# Altium PCB MJVESC_MINI_CIR_VER03.PcbDoc (part 2 of 2)
Units mm, origin at the board's own origin, x right, y up, seen from the top; angles counter-clockwise.
Board outline 57.82 x 58.2 mm, 2 copper layers (Component Side, Bottom Layer), stack 0.325 mm thick; 121 components, 105 nets, 463 pads, 467 vias.
Unrouted connection lines stored in the file: 33.
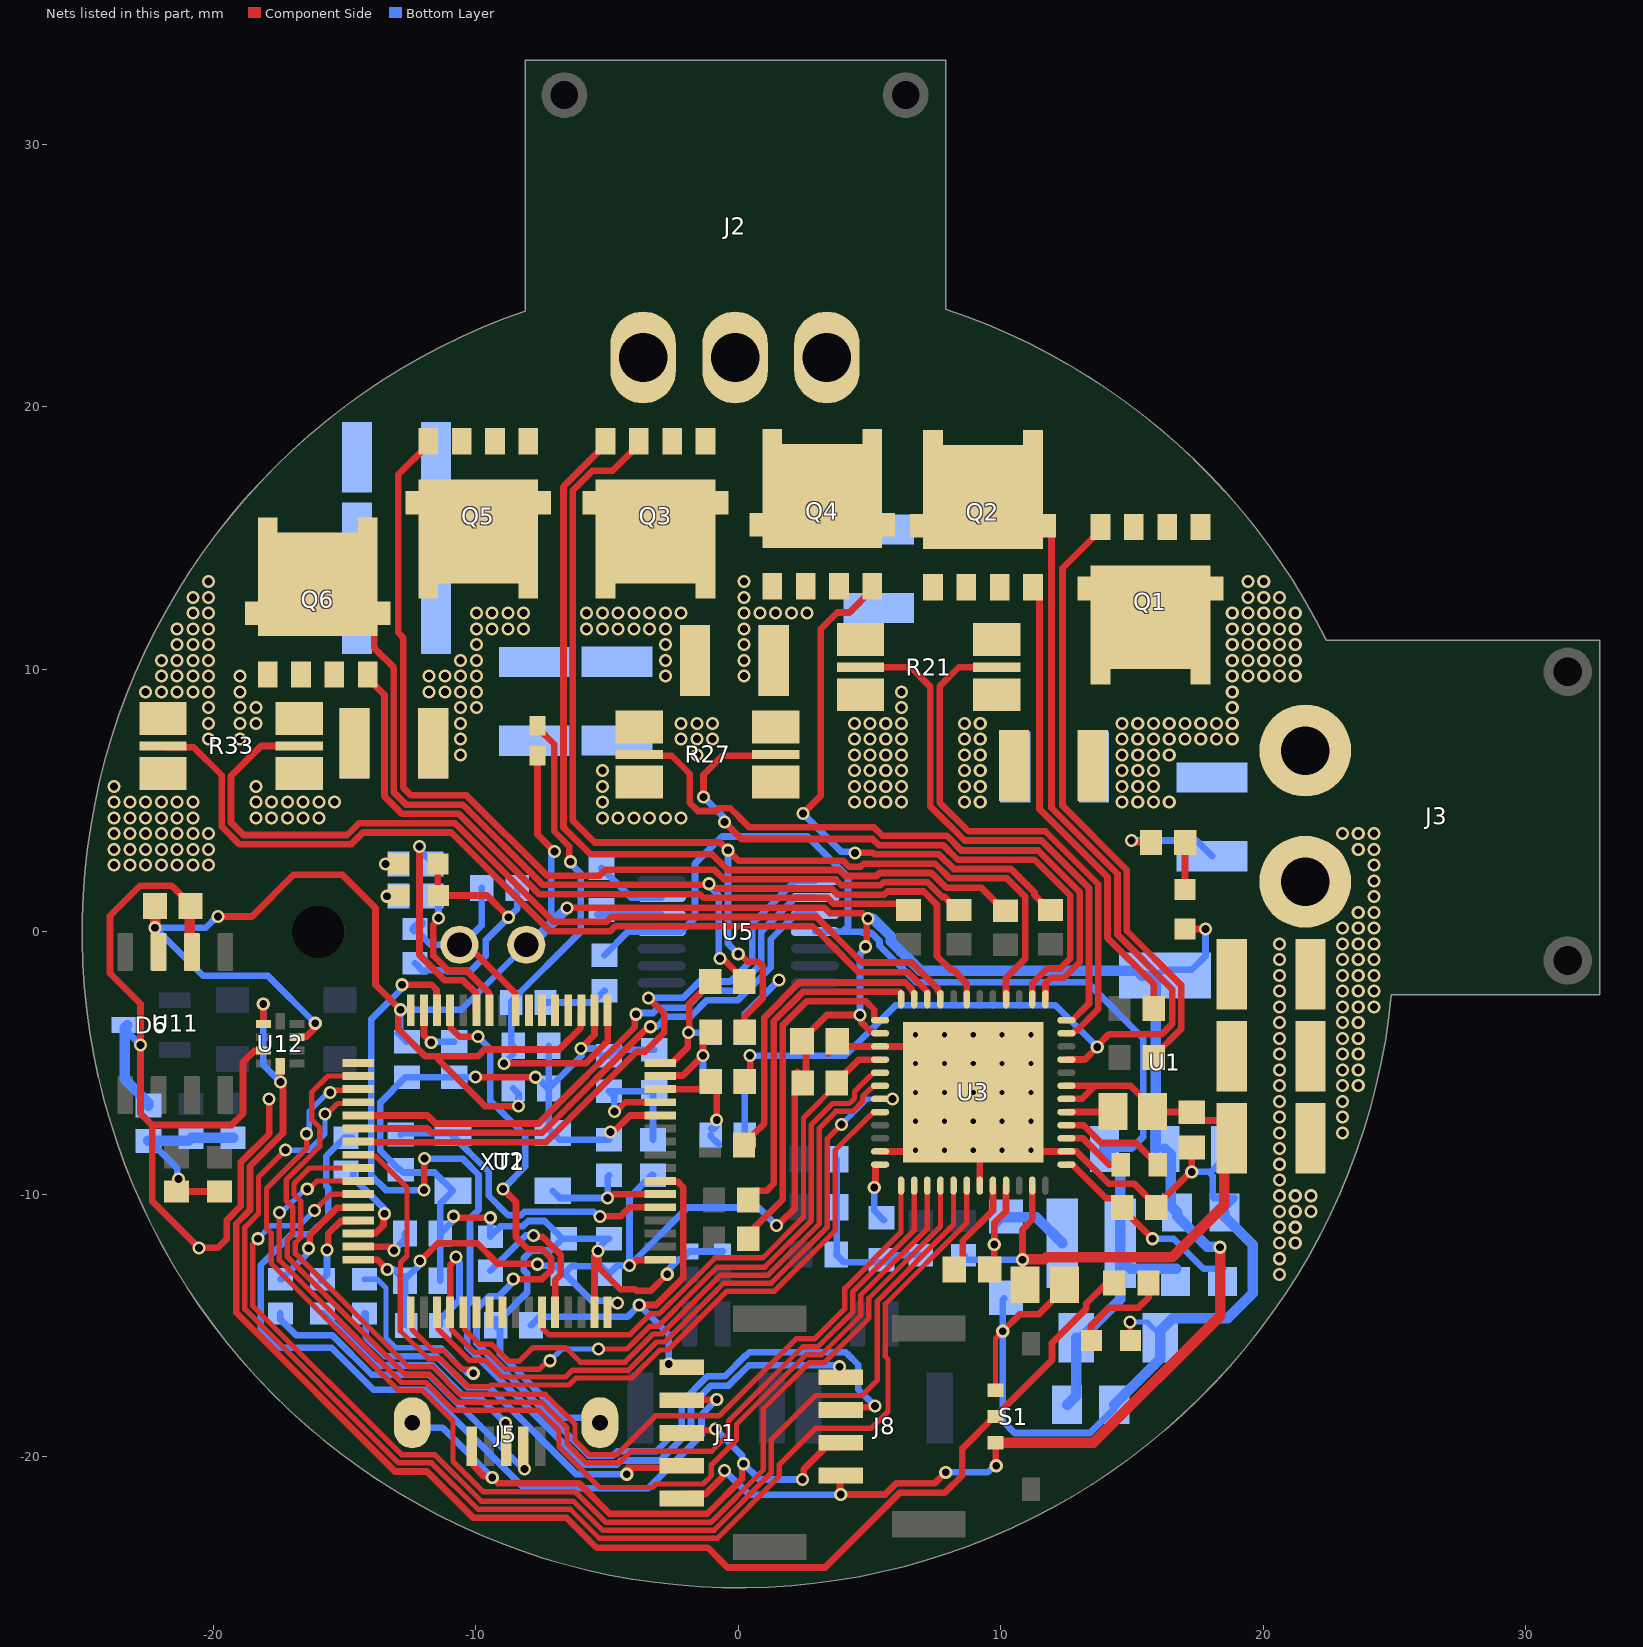
[diagram p2: the nets of this part, all layers, seen from the top]

## Via types
v1: diameter 0.5, hole 0.3, Component Side to Bottom Layer, tented both sides, 442 vias
v2: diameter 0.5, hole 0.2, Component Side to Bottom Layer, 25 vias

## Nets (pads, with @x,y where several pads share a name; then routed paths per layer and width w, separated by ;. In a path a pad name is that pad's centre, name@x,y a point inside that pad or via, vN(x,y) a via of type N, cw(c..) or ccw(c..) an arc to the next point about the centre after c; other vN are vias at no path point) (continued)
GND: C1.1 C2.2 C3.1 C4.1 C5.2 C6.2 C7.2 C8.1 C9.1 C10.1 C11.1 C12.2 C13.1 C14.2 C15.2 C16.2 C17.1 C19.2 C22.1 C23.1 C24.2 C25.2 C26.2 C32.1 C33.2 C34.2 C35.2 C37.1 C40.2 C41.2 C42.2 C43.2 C44.2 C46.2 C47.1 C48.1 C49.2 C50.2 C59.1 C65.1 D1.2 D3.2 D4.2 D5.2 D6.3 J1.3 J3.2 J5.5 J5.6 J5.7 J8.2 R3.2 R6.1 R7.2 R15.1 R21.2 R24.1 R27.2 R29.1 R33.2 R35.2 R37.2 R44.2 S1.2 U1.1 U2.12 U2.18 U2.63 U3.2 U3.27 U3.35 U3.43 U3.49 U5.13 U11.2 U12.3 XT1.G | length 212.5
  Component Side w0.203: 3.425,-4.675 3.675,-4.425 C26.2@3.675,-4.175 ; S1.2@9.795,-17.475 9.795,-15.505 v1(10.075,-15.225) ; v1(14.925,-14.875) 14.925,-15.6 D5.2@14.95,-15.575
  Component Side w0.254: C47.1@-20.875,0.975 -20.875,1.025 -21.602,1.752 -22.79,1.752 -23.937,0.605 -23.937,-1.585 -22.775,-2.747 v1(-22.775,-4.325) -22.775,-6.927 -22.335,-7.367 ; U12.3@-18.09,-4.525 -18.113,-4.548 -18.445,-4.548 -18.875,-4.978 -18.875,-6.937 -19.305,-7.367 -22.335,-7.367 ; v1(-17.875,-6.378) -17.875,-7.704 -18.963,-8.791 -18.963,-10.463 -19.485,-10.985 -19.485,-11.699 -19.837,-12.05 v1(-20.55,-12.05) -22.335,-10.265 -22.335,-7.367 ; D1.2@-11.45,2.575 -11.45,1.4 D3.2@-11.425,1.375 -9.575,1.375 v1(-8.75,0.55) ; v1(-10.85,-10.844) -10.85,-10.9 v1(-9.45,-10.9) ; J5.5@-10.15,-19.6 -10.077,-19.673 -10.077,-20.365 -9.689,-20.753 -9.422,-20.753 v1(-9.375,-20.8) -9.161,-21.014 -6.075,-21.014 -4.912,-22.177 -1.185,-22.177 0.153,-20.839 0.153,-20.32 v1(0.2,-20.273) ; v1(-10.013,-5.544) -10.01,-5.548 v1(-7.725,-5.548) ; v1(-6,-4.45) -5.479,-3.929 U2.18@-5.479,-3.003 ; U2.63@-5.479,-14.503 -5.479,-12.371 -5.35,-12.242 v1(-5.35,-12.175) -5.315,-12.21 -5.315,-12.806 -4.497,-13.624 -3.942,-13.624 -3.888,-13.678 -3.332,-13.678 -2.711,-13.056 v1(-2.711,-13.053) ; v1(-4.875,-7.637) -4.767,-7.637 -4.132,-7.003 U2.12@-2.979,-7.003 ; J1.3@-2.15,-19.1 -2.047,-18.997 -0.922,-18.997 v1(-0.875,-18.95) ; v1(2.45,-20.875) 2.497,-20.828 2.497,-20.478 3.325,-19.65 J8.2@3.875,-19.65 ; C26.2@3.675,-4.175 3.875,-4.375 U3.27@5.4,-4.375 6.3,-4.375 v2(6.75,-3.925) v2(7.85,-5.025) v2(8.95,-6.125) ; U3.35@5.4,-8.375 6.35,-8.375 6.4,-8.325 v2(6.75,-8.325) v2(7.85,-7.225) v2(8.95,-6.125) ; U3.43@9.2,-9.675 9.2,-8.575 v2(8.95,-8.325) v2(8.95,-7.225) v2(8.95,-6.125) ; v1(10.075,-15.225) 10.727,-14.573 11.452,-14.573 12.425,-13.6 C22.1@12.425,-13.45 ; v1(14.975,3.475) 15.05,3.4 R3.2@15.725,3.4 ; R37.2@15.925,-10.503 R37.2@15.925,-10.453 ; C9.1@17.275,-8.225 v1(17.275,-9.153) 17.225,-9.153 R37.2@15.925,-10.453 ; v2(8.95,-6.125) v2(10.05,-7.225) v2(11.15,-8.325) 11.2,-8.375 U3.2@12.5,-8.375 12.502,-8.377 12.885,-8.377 14.11,-9.602 15.074,-9.602 R37.2@15.925,-10.453
  Component Side w0.4: U11.2@-20.9,-0.8 -20.9,0.95 C47.1@-20.875,0.975
  Bottom Layer w0.203: v1(14.925,-14.875) 15.575,-14.875 16.075,-15.375 16.125,-15.425 C59.1@16.075,-15.475
  Bottom Layer w0.254: D6.3@-23.275,-3.56 -23.275,-3.825 v1(-22.775,-4.325) ; J5.7@-12.425,-18.71 -12.237,-18.898 -11.277,-18.898 v1(-9.375,-20.8) ; R7.2@-12.325,-1.2 -12.027,-1.498 -11.894,-1.498 -11.869,-1.473 -11.118,-1.473 -11.089,-1.502 -10.205,-1.502 -9.618,-0.915 -9.618,-0.316 -8.421,0.881 C17.1@-8.421,1.664 ; C1.1@-11.352,-13.303 C10.1@-11.352,-11.498 ; v1(-10.85,-10.844) -10.85,-10.997 C10.1@-11.352,-11.498 ; v1(-10.013,-5.544) C11.1@-10.822,-5.544 C4.1@-12.627,-5.544 -12.677,-5.544 -13.637,-6.505 -13.637,-8.351 -12.91,-9.078 C16.2@-12.86,-9.078 -12.76,-9.177 -11.573,-9.177 XT1.G@-10.875,-9.875 -11.352,-10.352 C10.1@-11.352,-11.498 ; v1(-9.45,-10.9) R6.1@-9.45,-11.625 -9.047,-11.222 -8.201,-11.222 -8.004,-11.025 -7.375,-11.025 C5.2@-6.7,-11.7 ; v1(-7.725,-5.548) -7.7,-5.523 -7.248,-5.975 C2.2@-7.225,-5.975 ; R35.2@-7.35,-2.7 -5.55,-2.7 C23.1@-5.1,-2.25 ; C37.1@-7.225,-4.35 C2.2@-7.225,-5.975 ; v1(-6,-4.45) -5.478,-4.45 -5.2,-4.728 C7.2@-4.927,-4.728 -4.699,-4.5 C6.2@-3.2,-4.5 ; -5.978,-4.728 C2.2@-7.225,-5.975 ; v1(-5.35,-12.175) -5.35,-12.108 -5.298,-12.056 -5.298,-12.023 C65.1@-4.975,-11.7 ; J5.6@-5.275,-18.71 -5.461,-18.524 -6.637,-18.524 -9.079,-16.082 -9.079,-15.171 C13.1@-9.25,-15 -9.25,-14.773 -9.073,-14.773 -8.048,-13.748 -8.048,-13.022 -8.179,-12.891 -8.179,-12.455 -7.87,-12.146 -7.146,-12.146 C5.2@-6.7,-11.7 ; C24.2@-5.213,2.425 -4.088,1.3 U5.13@-2.925,1.3 ; C14.2@-4.927,-7.932 -6.818,-7.932 XT1.G@-7.075,-7.675 -7.225,-7.525 C2.2@-7.225,-5.975 ; C65.1@-4.925,-11.7 C65.1@-4.975,-11.7 ; v1(-2.711,-13.053) -2.664,-13.006 -2.664,-12.876 -2.276,-12.488 -2.164,-12.488 -1.861,-12.185 C48.1@-1.841,-12.185 C49.2@-0.6,-12.185 ; v1(-0.875,-18.95) 0.153,-19.978 0.153,-20.226 v1(0.2,-20.273) 0.802,-20.875 v1(2.45,-20.875) ; R15.1@0.25,-7.75 R24.1@0.25,-5.7 ; R15.1@0.25,-7.725 R15.1@0.25,-7.7 ; R29.1@0.25,-3.85 0.25,-3.141 v1(1.55,-1.841) ; C19.2@3.75,-8.675 C15.2@3.75,-10.5 3.75,-12.275 C12.2@3.725,-12.3 4.025,-12.6 5.6,-12.6 5.875,-12.325 R44.2@6.95,-12.325 ; D4.2@10.125,-13.975 10.075,-14.025 v1(10.075,-15.225) 10.075,-18.65 10.525,-19.1 13.4,-19.1 14.325,-18.175 C3.1@14.325,-18.025 ; v1(14.975,3.475) 17.45,3.475 C42.2@18.05,2.875 ; v1(17.275,-9.153) 17.921,-9.153 ; C8.1@18.519,-10.7 18.519,-10.55 18.919,-10.15 18.119,-10.15 18.071,-10.102 18.071,-9.302 17.921,-9.153 ; U1.1@18.55,-8.275 18.55,-8.6 17.997,-9.153 17.921,-9.153 ; C5.2@-6.7,-11.7 C5.2@-6.65,-11.7 C65.1@-4.975,-11.7
  Bottom Layer w0.4: D6.3@-23.275,-3.56 -23.375,-3.66 -23.375,-5.625 -22.475,-6.525 C50.2@-22.475,-6.625 ; C3.1@14.325,-18.025 16.075,-16.275 C59.1@16.075,-15.475 16.075,-15.375 16.075,-15.2 16.55,-14.725 18.645,-14.725 19.6,-13.77 19.6,-11.931 18.519,-10.85 C8.1@18.519,-10.7
  other v1: 20.619,-13.065 20.619,-12.465 20.619,-11.865 21.219,-11.865 20.619,-11.265 21.219,-11.265 20.619,-10.665 21.219,-10.665 21.819,-10.665 20.619,-10.065 21.219,-10.065 21.819,-10.065 20.619,-9.465 20.619,-8.865 20.619,-8.265 20.619,-7.665 23.019,-7.665 20.619,-7.065 23.019,-7.065 20.619,-6.465 23.019,-6.465 20.619,-5.865 23.019,-5.865 23.619,-5.865 20.619,-5.265 23.019,-5.265 23.619,-5.265 20.619,-4.665 23.019,-4.665 23.619,-4.665 20.619,-4.065 23.019,-4.065 23.619,-4.065 20.619,-3.465 23.019,-3.465 23.619,-3.465 20.619,-2.865 23.019,-2.865 23.619,-2.865 24.219,-2.865 20.619,-2.265 23.019,-2.265 23.619,-2.265 24.219,-2.265 20.619,-1.665 23.019,-1.665 23.619,-1.665 24.219,-1.665 20.619,-1.065 23.019,-1.065 23.619,-1.065 24.219,-1.065 20.619,-0.465 23.019,-0.465 23.619,-0.465 24.219,-0.465 23.019,0.135 23.619,0.135 24.219,0.135 23.619,0.735 24.219,0.735 24.219,1.335 24.219,1.935 -23.781,2.535 -23.181,2.535 -22.581,2.535 -21.981,2.535 -21.381,2.535 -20.781,2.535 -20.181,2.535 24.219,2.535 -23.781,3.135 -23.181,3.135 -22.581,3.135 -21.981,3.135 -21.381,3.135 -20.781,3.135 -20.181,3.135 23.619,3.135 24.219,3.135 -23.781,3.735 -23.181,3.735 -22.581,3.735 -21.981,3.735 -21.381,3.735 -20.781,3.735 -20.181,3.735 23.019,3.735 23.619,3.735 24.219,3.735 -23.781,4.335 -23.181,4.335 -22.581,4.335 -21.981,4.335 -21.381,4.335 -20.781,4.335 -5.181,4.335 -4.581,4.335 -3.981,4.335 -3.381,4.335 -2.781,4.335 -2.181,4.335 -23.781,4.935 -23.181,4.935 -22.581,4.935 -21.981,4.935 -21.381,4.935 -20.781,4.935 -5.181,4.935 4.419,4.935 5.019,4.935 5.619,4.935 6.219,4.935 -23.781,5.535 -5.181,5.535 4.419,5.535 5.019,5.535 5.619,5.535 6.219,5.535 -5.181,6.135 4.419,6.135 5.019,6.135 5.619,6.135 6.219,6.135 -1.581,6.735 4.419,6.735 5.019,6.735 5.619,6.735 6.219,6.735 -20.181,7.335 -2.181,7.335 -1.581,7.335 -0.981,7.335 4.419,7.335 5.019,7.335 5.619,7.335 6.219,7.335 -20.181,7.935 -2.181,7.935 -1.581,7.935 -0.981,7.935 4.419,7.935 5.019,7.935 5.619,7.935 6.219,7.935 -20.181,8.535 6.219,8.535 -22.581,9.135 -21.981,9.135 -21.381,9.135 -20.781,9.135 -20.181,9.135 6.219,9.135 -21.981,9.735 -21.381,9.735 -20.781,9.735 -20.181,9.735 -21.981,10.335 -21.381,10.335 -20.781,10.335 -20.181,10.335 -21.381,10.935 -20.781,10.935 -20.181,10.935 -21.381,11.535 -20.781,11.535 -20.181,11.535 -20.781,12.135 -20.181,12.135 -20.781,12.735 -20.181,12.735 -20.181,13.335
  other v2: 7.85,-8.325 10.05,-8.325 6.75,-7.225 11.15,-7.225 6.75,-6.125 7.85,-6.125 10.05,-6.125 11.15,-6.125 6.75,-5.025 8.95,-5.025 10.05,-5.025 11.15,-5.025 7.85,-3.925 8.95,-3.925 10.05,-3.925 11.15,-3.925
H1: U2.41 U3.37 | length 37.9
  Component Side w0.203: U2.41@-14.479,-9.003 -16.337,-9.003 -16.927,-9.593 -16.927,-10.008 -16.671,-10.264 -16.671,-11.647 -16.879,-11.855 -16.879,-12.27 -12.575,-16.575 -11.654,-16.575 -10.599,-17.63 -9.347,-17.63 -9.334,-17.618 -8.416,-17.618 -8.403,-17.63 -7.357,-17.63 -6.227,-18.761 -6.227,-19.379 -5.669,-19.937 -4.648,-19.937 -3.16,-18.449 -0.737,-18.449 2.197,-15.515 2.909,-15.515 4.059,-14.365 4.059,-13.593 6.2,-11.452 U3.37@6.2,-9.675
H2: U2.42 U3.39 | length 40.7
  Component Side w0.203: v1(-17.476,-10.701) -17.485,-10.71 -17.485,-12.521 -12.826,-17.181 -11.905,-17.181 -10.85,-18.236 -9.096,-18.236 -9.083,-18.223 -8.667,-18.223 -8.654,-18.236 -7.608,-18.236 -6.832,-19.012 -6.832,-19.63 -5.285,-21.178 -3.272,-21.178 -3.143,-21.048 -1.343,-21.048 -1.027,-20.732 -1.027,-20.317 -0.071,-19.361 -0.071,-18.769 2.578,-16.121 3.16,-16.121 4.665,-14.616 4.665,-13.844 7.2,-11.309 U3.39@7.2,-9.675 ; v1(-16.426,-9.8) -16.345,-9.8 -16.048,-9.503 U2.42@-14.479,-9.503
  Bottom Layer w0.203: v1(-17.476,-10.701) -17.401,-10.701 -16.501,-9.8 v1(-16.426,-9.8)
H3: U2.43 U3.41 | length 46.2
  Component Side w0.203: v1(-18.301,-11.701) -18.5,-11.9 -18.5,-14.256 -12.819,-19.937 -11.56,-19.937 -9.793,-21.704 -6.278,-21.704 -5.173,-22.808 -0.924,-22.808 1.251,-20.633 1.251,-19.368 2.946,-17.674 4.707,-17.674 5.296,-17.085 5.296,-14.07 8.2,-11.166 U3.41@8.2,-9.675 ; v1(-16.151,-10.626) -15.528,-10.003 U2.43@-14.479,-10.003
  Bottom Layer w0.203: v1(-18.301,-11.701) -17.802,-11.202 -16.727,-11.202 v1(-16.151,-10.626)
HALL_1: U2.37 U5.2 | length 22.1
  Component Side w0.254: U2.37@-14.479,-7.003 -11.848,-7.003 -11.54,-7.311 -7.615,-7.311 -3.945,-3.641 -3.945,-3.197 v1(-3.898,-3.15)
  Bottom Layer w0.254: v1(-3.898,-3.15) -3.851,-3.103 -3.573,-3.103 -3.568,-3.098 -3.248,-3.098 -3.044,-2.894 -1.979,-2.894 -1.339,-2.254 -0.155,-2.254 0.879,-1.22 0.879,0.004 2.175,1.3 U5.2@2.925,1.3
HALL_2: U2.38 U5.3 | length 21.5
  Component Side w0.254: U2.38@-14.479,-7.503 -11.849,-7.503 -11.686,-7.665 -7.469,-7.665 -3.476,-3.672 -3.397,-3.672 v1(-3.35,-3.625)
  Bottom Layer w0.254: v1(-3.35,-3.625) -3.11,-3.625 -2.733,-3.248 -1.833,-3.248 -1.193,-2.608 -0.008,-2.608 1.233,-1.367 1.233,-0.292 2.175,0.65 U5.3@2.925,0.65
HALL_3: U2.39 U5.1 | length 24
  Component Side w0.254: U2.39@-14.479,-8.003 -14.462,-8.019 -7.319,-8.019 -3.876,-4.576 -3.555,-4.576 -2.823,-3.843 -2.823,-3.122 v1(-3.42,-2.525)
  Bottom Layer w0.254: v1(-3.42,-2.525) -2.111,-2.525 -1.486,-1.9 -0.302,-1.9 0.525,-1.073 0.525,0.3 2.175,1.95 U5.1@2.925,1.95
I2C2_SCL/USART3_TX: J8.3 U2.29 | length 39.7
  Component Side w0.254: U2.29@-10.979,-3.003 -10.956,-3.026 -10.956,-3.667 -10.621,-4.003 v1(-9.922,-4.003) ; v1(-8.973,-9.8) -8.472,-10.301 -8.472,-11.649 -8.019,-12.103 -7.477,-12.103 -7.125,-12.455 -7.125,-12.891 -7.474,-13.241 v1(-8.575,-13.241) ; J8.3@3.875,-18.4 4.152,-18.123 5.153,-18.123 v1(5.2,-18.076)
  Bottom Layer w0.254: v1(-9.922,-4.003) -9.452,-4.473 -9.452,-6.439 -8.12,-7.771 -8.12,-8.948 v1(-8.973,-9.8) ; v1(-8.575,-13.241) -8.622,-13.288 -8.622,-13.389 -9.12,-13.887 -9.479,-13.887 -9.977,-14.385 -9.977,-15.685 -5.7,-19.962 -4.782,-19.962 -4.615,-19.795 -3.128,-19.795 -2.158,-18.825 -2.158,-17.914 -1.187,-16.944 -0.52,-16.944 0.255,-16.169 0.271,-16.169 0.416,-16.024 4.08,-16.024 4.133,-16.077 4.147,-16.077 4.57,-16.5 4.57,-17.446 v1(5.2,-18.076)
I2C2_SDA/USART3_RX: J8.4 U2.30 | length 41.4
  Component Side w0.254: v1(-12.817,-2.025) -11.692,-2.025 -11.502,-2.215 -11.502,-2.98 U2.30@-11.479,-3.003 ; v1(-11.976,-9.85) -11.963,-9.838 -11.963,-8.663 v1(-11.951,-8.65) ; v1(3.85,-16.576) 3.85,-16.95 3.875,-16.975 J8.4@3.875,-17.15
  Bottom Layer w0.254: v1(-12.817,-2.025) -12.671,-2.025 -13.991,-3.345 -13.991,-9.288 -13.429,-9.85 v1(-11.976,-9.85) ; v1(-11.951,-8.65) -10.508,-8.65 -9.898,-9.26 -9.898,-10.603 -10.224,-10.928 -10.224,-14.131 -10.331,-14.239 -10.331,-15.831 -5.846,-20.316 -4.635,-20.316 -4.468,-20.149 -2.982,-20.149 -1.804,-18.971 -1.804,-18.061 -1.041,-17.298 -0.373,-17.298 0.402,-16.523 1.748,-16.523 3.847,-16.523 3.85,-16.526 v1(3.85,-16.576)
ISEN_A: R18.1 U3.25 | length 13
  Component Side w0.254: R18.1@0.575,-11.45 0.575,-11.317 1.698,-10.194 1.698,-3.56 2.61,-2.648 4.851,-2.648 5.177,-2.974 5.177,-3.373 5.179,-3.375 U3.25@5.4,-3.375
ISEN_B: R19.1 U3.24 | length 13.3
  Component Side w0.254: R19.1@0.225,-10.1 0.225,-10.102 0.329,-10.206 0.369,-10.206 0.369,-9.927 0.623,-9.927 0.673,-9.877 1.073,-9.877 1.344,-9.606 1.344,-4.936 1.344,-3.414 2.463,-2.294 6.14,-2.294 6.2,-2.354 U3.24@6.2,-2.575
ISEN_C: R20.1 U3.23 | length 12.2
  Component Side w0.254: R20.1@0.219,-8.125 0.411,-7.933 0.257,-7.779 0.515,-7.779 0.99,-7.304 0.99,-5.083 0.99,-3.267 2.317,-1.94 6.359,-1.94 6.602,-2.183 6.602,-2.256 6.7,-2.354 U3.23@6.7,-2.575
L1: U2.34 U3.38 | length 42.8
  Component Side w0.203: U2.34@-14.479,-5.503 -15.637,-5.503 -16.252,-6.118 -16.252,-7.158 -15.948,-7.462 -15.948,-8.184 -17.23,-9.466 -17.23,-10.237 -16.974,-10.493 -16.974,-11.521 -17.182,-11.729 -17.182,-12.396 -12.701,-16.878 -11.78,-16.878 -10.724,-17.933 -9.221,-17.933 -9.208,-17.921 -8.542,-17.921 -8.529,-17.933 -7.483,-17.933 -6.529,-18.886 -6.529,-19.505 -5.795,-20.239 -4.523,-20.239 -4.082,-19.798 -1.014,-19.798 -0.373,-19.158 -0.373,-18.644 2.453,-15.818 3.034,-15.818 4.362,-14.49 4.362,-13.719 6.7,-11.38 U3.38@6.7,-9.675
L2: U2.35 U3.40 | length 47.3
  Component Side w0.203: v1(-16.45,-7.7) -16.45,-8.257 -17.977,-9.785 -17.977,-11.315 -17.799,-11.493 -17.799,-12.636 -12.952,-17.484 -12.031,-17.484 -10.872,-18.642 -10.872,-20.184 -9.713,-21.342 -6.222,-21.342 -6.164,-21.401 -6.153,-21.401 -5.048,-22.505 -1.049,-22.505 0.948,-20.508 0.948,-18.179 2.704,-16.424 3.285,-16.424 4.968,-14.741 4.968,-13.97 7.7,-11.237 U3.40@7.7,-9.675 ; v1(-15.551,-6.125) -15.47,-6.125 -15.383,-6.038 -14.515,-6.038 U2.35@-14.479,-6.003
  Bottom Layer w0.203: v1(-16.45,-7.7) -16.347,-7.596 -16.347,-6.837 -15.958,-6.449 -15.692,-6.182 -15.608,-6.182 v1(-15.551,-6.125)
L3: U2.36 U3.42 | length 51
  Component Side w0.203: -18.803,-11.774 -18.803,-14.381 -12.945,-20.239 -11.685,-20.239 -9.918,-22.007 -6.404,-22.007 -5.299,-23.111 -0.798,-23.111 1.554,-20.759 1.554,-20.315 2.946,-18.924 5.062,-18.924 5.702,-18.284 5.702,-16.291 5.599,-16.188 5.599,-14.196 8.7,-11.094 U3.42@8.7,-9.675 ; -18.802,-11.774 -18.802,-11.268 -18.28,-10.746 -18.28,-9.355 v1(-17.251,-8.325) ; v1(-15.751,-6.95) -15.67,-6.95 -15.271,-6.551 -14.527,-6.551 U2.36@-14.479,-6.503
  Bottom Layer w0.203: v1(-17.251,-8.325) -16.366,-8.325 -15.751,-7.71 v1(-15.751,-6.95)
LED_GREEN: R2.1 U2.26 | length 5.8
  Component Side w0.254: v1(-11.426,0.525) -11.426,0.458 -11.622,0.262 -11.622,-0.915 -11.035,-1.502 -10.337,-1.502 -9.502,-2.337 -9.502,-2.98 U2.26@-9.479,-3.003
  Bottom Layer w0.254: R2.1@-11.65,1.35 -11.426,1.126 v1(-11.426,0.525)
LED_RED: R1.1 U2.27 | length 8.4
  Component Side w0.254: v1(-12.151,3.25) -12.151,-0.887 -11.182,-1.856 -10.484,-1.856 -10.002,-2.338 -10.002,-2.98 U2.27@-9.979,-3.003
  Bottom Layer w0.254: v1(-12.151,3.25) -12.104,3.203 -12.104,3.079 -11.65,2.625 R1.1@-11.65,2.575
MOSI: C3.2 C23.2 C59.2 L2.2 R34.2 U1.3 U5.4 U5.11 | length 48.6
  Bottom Layer w0.254: C23.2@-5.1,-0.9 -4.2,0 U5.11@-2.925,0 -2.175,0 -1.652,0.523 -1.652,2.593 -0.618,3.627 2.637,3.627 4.18,2.084 4.18,0.205 3.975,0 ; U5.4@2.925,0 3.975,0 ; U1.3@13.95,-8.275 14.975,-8.275 15.423,-7.827 15.423,-4.064 13.284,-1.925 6.763,-1.925 5.377,-0.539 5.377,-0.357 5.069,-0.048 4.745,-0.048 4.697,0 3.975,0
  Bottom Layer w0.4: C3.2@12.525,-18.025 12.875,-17.675 C59.2@12.875,-15.475 13.075,-15.475 14.55,-14 L2.2@14.55,-11.972 ; U1.3@13.95,-8.275 14.55,-8.875 L2.2@14.55,-11.972 ; R34.2@16.675,-12.85 14.95,-12.85 14.55,-12.45 L2.2@14.55,-11.972
NetC6_1: C6.1 C7.1 L1.1 U2.13 | length 6.3
  Component Side w0.254: v1(-4.725,-6.85) -4.658,-6.85 -4.311,-6.503 U2.13@-2.979,-6.503
  Bottom Layer w0.254: v1(-4.725,-6.85) -4.725,-6.279 C7.1@-4.927,-6.078 C6.1@-3.222,-6.078 ; L1.1@-3.25,-7.925 -3.25,-6.105 C6.1@-3.222,-6.078 ; C6.1@-3.2,-6.1 C6.1@-3.222,-6.078
NetC10_2: C10.2 U2.47 | length 2.2
  Component Side w0.254: U2.47@-14.479,-12.003 -13.272,-12.003 v1(-13.125,-12.15)
  Bottom Layer w0.254: v1(-13.125,-12.15) -12.702,-11.727 C10.2@-12.702,-11.498
NetC11_2: C11.2 U2.31 | length 2.2
  Component Side w0.254: U2.31@-11.979,-3.003 -11.979,-3.946 v1(-11.7,-4.225)
  Bottom Layer w0.254: v1(-11.7,-4.225) -11.669,-4.194 C11.2@-10.822,-4.194
NetC14_1: C14.1 U2.6 XT1.1 | length 5.2
  Component Side w0.254: v1(-4.979,-10.15) -4.912,-10.15 -4.765,-10.003 U2.6@-2.979,-10.003
  Bottom Layer w0.254: XT1.1@-7.075,-9.875 -6.8,-10.15 v1(-4.979,-10.15) -4.979,-9.334 C14.1@-4.927,-9.282
NetC16_1: C16.1 U2.5 XT1.3 | length 12
  Component Side w0.254: v1(-5.273,-10.85) -4.491,-10.85 -4.144,-10.503 U2.5@-2.979,-10.503
  Bottom Layer w0.254: C16.1@-12.86,-7.728 -12.808,-7.675 -10.983,-7.675 -9.511,-9.146 -9.511,-10.064 -8.772,-10.804 -8.284,-10.804 -8.151,-10.671 -5.519,-10.671 -5.34,-10.85 v1(-5.273,-10.85)
NetC18_1: C18.1 U3.5 | length 1.8
  Component Side w0.254: U3.5@12.5,-6.875 14.25,-6.875 C18.1@14.275,-6.85
NetC20_2: C20.2 C21.2 Q2.1 Q2.2 Q2.3 R21.1
  other v1: 8.619,4.935 9.219,4.935 8.619,5.535 9.219,5.535 8.619,6.135 9.219,6.135 8.619,6.735 9.219,6.735 8.619,7.335 9.219,7.335 8.619,7.935 9.219,7.935
NetC24_1: C24.1 U5.12 | length 2.5
  Bottom Layer w0.254: C24.1@-5.375,0.65 U5.12@-2.925,0.65
NetC31_1: C31.1 U3.3 | length 2.5
  Component Side w0.254: U3.3@12.5,-7.875 13.125,-7.875 14.125,-8.875 C31.1@14.575,-8.875
NetC31_2: C31.2 U3.4 | length 4.1
  Component Side w0.254: U3.4@12.5,-7.375 13.15,-7.375 13.825,-8.05 15.15,-8.05 C31.2@15.975,-8.875
NetC32_2: C32.2 U3.36 | length 2.5
  Component Side w0.254: v1(5.179,-9.752) 5.226,-9.705 5.226,-8.877 5.228,-8.875 U3.36@5.4,-8.875
  Bottom Layer w0.254: v1(5.179,-9.752) 5.179,-10.629 C32.2@5.55,-11
NetC36_2: C36.2 C39.2 Q4.1 Q4.2 Q4.3 R27.1
  other v1: 0.219,9.735 0.219,10.335 0.219,10.935 0.219,11.535 0.219,12.135 0.819,12.135 1.419,12.135 2.019,12.135 2.619,12.135 0.219,12.735 0.219,13.335
NetC50_1: C50.1 R40.2 R41.1 R42.2 R43.1 | length 7.8
  Component Side w0.254: v1(-21.325,-9.425) -21.325,-9.602 -21.623,-9.9 -21.67,-9.9 R43.1@-19.769,-9.9
  Bottom Layer w0.254: C50.1@-22.475,-7.975 -22.425,-7.975 -21.372,-9.028 -21.372,-9.378 v1(-21.325,-9.425)
  Bottom Layer w0.4: C50.1@-22.475,-7.975 -20.959,-7.975 R40.2@-20.85,-7.866 -20.834,-7.85 R42.2@-19.25,-7.85
NetC51_1: C51.1 D4.1 L2.1 U3.45 | length 7.3
  Component Side w0.254: C51.1@9.575,-12.875 9.75,-12.7 9.75,-11.102 10.2,-10.652 U3.45@10.2,-9.675
  Bottom Layer w0.254: v1(9.75,-11.925) 9.75,-11.25 D4.1@10.125,-10.875
  Bottom Layer w0.4: D4.1@10.125,-10.875 11.35,-10.875 L2.1@12.35,-11.875
NetC51_2: C51.2 U3.44 | length 3.8
  Component Side w0.254: C51.2@8.225,-12.875 8.548,-12.552 8.548,-11.775 9.7,-10.623 U3.44@9.7,-9.675
NetC57_2: C57.2 C58.2 Q6.1 Q6.2 Q6.3 R33.1
  other v1: -18.381,4.335 -17.781,4.335 -17.181,4.335 -16.581,4.335 -15.981,4.335 -18.381,4.935 -17.781,4.935 -17.181,4.935 -16.581,4.935 -15.981,4.935 -15.381,4.935 -18.381,5.535 -18.981,7.335 -18.981,7.935 -18.381,7.935 -18.981,8.535 -18.381,8.535 -18.981,9.135 -18.981,9.735
NetD1_1: D1.1 R1.2 | length 1
  Component Side w0.254: v1(-13.45,2.575) D1.1@-12.95,2.575
  Bottom Layer w0.254: v1(-13.45,2.575) R1.2@-12.95,2.575
NetD2_2: D2.2 R3.1 | length 1.8
  Component Side w0.254: D2.2@17.019,1.6 17.019,3.394 R3.1@17.025,3.4
NetD3_1: D3.1 R2.2 | length 0.9
  Component Side w0.254: v1(-13.385,1.35) -13.36,1.375 D3.1@-12.925,1.375
  Bottom Layer w0.254: v1(-13.385,1.35) R2.2@-12.95,1.35
NetD5_1: D5.1 R39.2 | length 3.8
  Component Side w0.254: D5.1@13.45,-15.575 13.45,-15 14.125,-14.325 15.25,-14.325 15.625,-13.95 R39.2@15.625,-13.382
NetJ1_2: J1.2 R4.1 | length 15.4
  Component Side w0.254: v1(-4.25,-20.676) -4.25,-20.475 -4.203,-20.428 -2.228,-20.428 J1.2@-2.15,-20.35
  Bottom Layer w0.254: R4.1@-14.25,-14.55 -14.2,-14.55 -14.2,-15.439 -13.462,-16.177 -11.495,-16.177 -10.319,-17.353 -9.502,-17.353 -6.185,-20.67 -4.256,-20.67 v1(-4.25,-20.676)
NetJ1_4: J1.4 R5.1 | length 32.4
  Component Side w0.254: J1.4@-2.15,-17.85 -2.138,-17.837 -0.835,-17.837 v1(-0.823,-17.825)
  Bottom Layer w0.254: R5.1@-14.715,-7.861 -15.009,-7.861 -15.702,-8.554 -15.702,-9.692 -15.624,-9.77 -15.624,-10.844 -16.316,-11.536 -17.027,-11.536 -18.202,-12.71 -18.202,-15.09 -17.438,-15.854 -15.497,-15.854 -13.893,-17.458 -11.914,-17.458 -8.169,-21.203 -3.427,-21.203 -1.402,-19.178 -1.402,-18.404 v1(-0.823,-17.825)
NetJ5_2: J5.2 R11.2 | length 12.8
  Component Side w0.254: J5.2@-8.2,-19.6 -8.175,-19.625 -8.175,-20.451 v1(-8.15,-20.476)
  Bottom Layer w0.254: R11.2@-17.45,-14.55 -17.45,-14.775 -16.85,-15.375 -15.476,-15.375 -13.966,-16.885 -11.788,-16.885 -8.197,-20.476 v1(-8.15,-20.476)
NetJ5_3: J5.3 R12.2 | length 9.6
  Component Side w0.254: v1(-8.875,-18.725) -8.862,-18.737 -8.862,-19.587 J5.3@-8.85,-19.6
  Bottom Layer w0.254: R12.2@-15.85,-14.55 -15.8,-14.55 -13.819,-16.531 -11.641,-16.531 -10.465,-17.707 -9.893,-17.707 v1(-8.875,-18.725)
NetQ1_4: Q1.4 R16.2 | length 23
  Component Side w0.254: Q1.4@13.58,15.425 13.58,15.075 12.35,13.845 12.35,4.8 14.801,2.349 14.801,0.032 16.881,-2.048 16.881,-3.694 15.825,-4.75 R16.2@15.825,-4.8
NetQ2_4: Q2.4 R17.2 | length 17.8
  Component Side w0.254: Q2.4@11.475,13.117 11.475,4.674 14.068,2.081 14.068,-0.237 15.825,-1.994 R17.2@15.825,-2.925
NetQ3_4: Q3.4 R25.2 | length 33.6
  Component Side w0.254: Q3.4@-5.06,18.683 -5.06,18.558 -6.662,16.955 -6.662,3.97 -5.638,2.946 -1,2.946 -0.405,2.351 3.841,2.351 4.073,2.119 5.265,2.119 5.381,2.235 7.358,2.235 7.917,1.676 9.249,1.676 10.125,0.8 R25.2@10.175,0.8
NetQ4_4: Q4.4 R26.2 | length 21.3
  Component Side w0.254: v1(2.458,4.5) 3.146,5.188 3.146,11.537 3.769,12.161 4.231,12.161 5.102,13.033 Q4.4@5.102,13.157 ; v1(4.438,3) 5.145,3 5.202,2.943 7.651,2.943 8.21,2.384 10.383,2.384 11.281,1.486 11.281,1.394 11.875,0.8 R26.2@12.1,0.8
  Bottom Layer w0.254: v1(2.458,4.5) 3.911,3.047 4.391,3.047 v1(4.438,3)
NetQ5_4: Q5.4 R30.2 | length 37.1
  Component Side w0.254: Q5.4@-11.81,18.683 -11.81,18.558 -12.957,17.411 -12.957,11.388 -12.771,11.202 -12.771,5.496 -12.468,5.193 -10.354,5.193 -7.295,2.135 -5.283,2.135 -5.066,2.352 -0.907,2.352 -0.552,1.997 3.695,1.997 3.927,1.765 5.412,1.765 5.528,1.881 7.211,1.881 7.77,1.322 7.853,1.322 8.35,0.825 R30.2@8.4,0.825
NetQ6_4: Q6.4 R31.2 | length 26.7
  Component Side w0.254: Q6.4@-14.125,9.792 -14.125,9.667 -13.479,9.022 -13.479,5.154 -12.81,4.485 -10.647,4.485 -7.589,1.427 -1.472,1.427 -1.334,1.289 3.401,1.289 3.633,1.057 6.243,1.057 R31.2@6.475,0.825
NetR6_2: R6.2 U2.60 | length 5.8
  Component Side w0.254: v1(-7.8,-11.576) -7.753,-11.623 -7.456,-11.623 -6.771,-12.308 -6.771,-13.076 -6.979,-13.284 U2.60@-6.979,-14.503
  Bottom Layer w0.254: R6.2@-9.45,-12.925 -8.101,-11.576 v1(-7.8,-11.576)
NetR34_1: R34.1 R37.1 U3.1 | length 7.7
  Component Side w0.254: U3.1@12.5,-8.875 12.721,-8.875 14.001,-10.155 14.327,-10.155 14.625,-10.453 14.625,-10.553 v1(15.775,-11.703)
  Bottom Layer w0.254: v1(15.775,-11.703) 16.585,-11.703 17.732,-12.85 R34.1@18.475,-12.85
NetR39_1: R39.1 S1.C U12.1 U12.5 | length 57.2
  Component Side w0.254: v1(-18.1,-2.756) -18.095,-2.761 -18.095,-3.52 U12.1@-18.09,-3.525 ; U12.5@-17.45,-5.135 v1(-17.45,-5.725) -17.45,-5.792 -17.348,-5.894 -17.348,-7.677 -18.609,-8.938 -18.609,-10.609 -19.131,-11.132 -19.131,-14.517 -13.081,-20.568 -11.86,-20.568 -10.093,-22.335 -6.54,-22.335 -5.4,-23.475 -1.162,-23.475 -0.41,-24.227 3.306,-24.227 6.158,-21.375 7.87,-21.375 8.535,-20.711 8.535,-19.69 9.75,-18.475 S1.C@9.795,-18.475 11.95,-16.32 11.95,-15.675 13.252,-14.373 13.252,-14.179 14.049,-13.382 R39.1@14.325,-13.382
  Bottom Layer w0.254: v1(-18.1,-2.756) -18.1,-5.075 v1(-17.45,-5.725)
nFAULT: R32.2 U2.59 U3.28 | length 20.2
  Component Side w0.203: U2.59@-7.479,-14.503 -7.43,-14.551 -7.43,-15.157 -7.233,-15.354 -4.124,-15.354 -3.324,-14.554 -3.002,-14.554 -1.966,-13.518 -0.875,-12.427 0.933,-12.427 2.481,-10.879 2.481,-7.094 3.75,-5.825 R32.2@3.75,-5.775
  Component Side w0.254: R32.2@3.775,-5.8 3.843,-5.732 3.875,-5.732 3.875,-5.6 4.6,-4.875 U3.28@5.4,-4.875
nRST: C13.2 J1.5 U2.7 | length 14.3
  Component Side w0.254: v1(-3.775,-14.226) -3.138,-14.226 -2.295,-13.382 -2.102,-13.189 -2.102,-9.738 -2.314,-9.526 -2.956,-9.526 U2.7@-2.979,-9.503 ; v1(-2.65,-16.476) -2.65,-16.452 -2.625,-16.427 -2.552,-16.5 J1.5@-2.15,-16.5
  Bottom Layer w0.254: C13.2@-7.9,-15 -7.578,-14.678 -4.227,-14.678 v1(-3.775,-14.226) -2.65,-15.351 v1(-2.65,-16.476)
SHA: J2.1 Q1.1 Q1.2 Q1.3 Q2.5_6 Q2.5_6_1 Q2.5_6_2 Q2.5_6_3 Q2.5_6_4 R14.2 U3.9 | length 41.3
  Component Side w0.254: R14.2@0.25,-5.714 0.45,-5.514 v1(0.45,-4.725) ; Q2.5_6_2@11.847,15.46 11.93,15.378 11.93,4.719 14.447,2.203 14.447,-0.115 16.527,-2.195 16.527,-3.515 16.135,-3.907 14.127,-3.907 13.654,-4.379 13.654,-4.422 13.203,-4.873 12.502,-4.873 U3.9@12.5,-4.875
  Bottom Layer w0.254: v1(0.45,-4.725) 4.075,-4.725 6,-2.8 12.075,-2.8 v1(13.676,-4.4)
SHB: J2.2 Q3.1 Q3.2 Q3.3 Q4.5_6 Q4.5_6_1 Q4.5_6_2 Q4.5_6_3 Q4.5_6_4 R23.2 U3.16 | length 46.9
  Component Side w0.254: Q3.3@-3.79,18.683 -3.79,18.558 -4.79,17.558 -5.557,17.558 -6.308,16.806 -6.308,4.233 -5.469,3.394 -0.693,3.394 v1(-0.4,3.1) -0.005,2.705 3.988,2.705 4.22,2.473 4.656,2.473 4.772,2.589 7.505,2.589 8.064,2.03 10.237,2.03 10.927,1.34 10.927,-1.04 10.2,-1.767 U3.16@10.2,-2.575 ; v1(-0.002,-0.855) 0.065,-0.855 0.358,-1.148 0.765,-1.148 0.927,-1.31 0.927,-2.548 0.25,-3.225 R23.2@0.25,-3.822 R23.2@0.25,-3.975
  Bottom Layer w0.254: v1(-0.4,3.1) -0.396,3.096 -0.396,-0.461 v1(-0.002,-0.855)
SHC: J2.3 Q5.1 Q5.2 Q5.3 Q6.5_6 Q6.5_6_1 Q6.5_6_2 Q6.5_6_3 Q6.5_6_4 R28.2 U3.19 | length 37.9
  Component Side w0.254: Q6.5_6@-14.012,11.743 -13.877,11.607 -13.877,10.811 -13.125,10.059 -13.125,5.301 -12.664,4.839 -10.5,4.839 -7.442,1.781 -1.014,1.781 -0.876,1.643 3.548,1.643 3.78,1.411 5.558,1.411 5.674,1.527 7.065,1.527 7.572,1.02 7.572,-0.939 8.079,-1.446 8.172,-1.446 8.698,-1.972 8.698,-2.573 U3.19@8.7,-2.575 ; v1(-0.705,-1.025) -0.7,-1.025 -0.65,-0.975 -0.65,-1.013 -0.591,-1.072 -0.553,-1.072 0.225,-1.85 R28.2@0.225,-1.9
  Bottom Layer w0.254: v1(-1.125,1.825) -1.125,1.759 -0.75,1.383 -0.75,-0.98 v1(-0.705,-1.025)
SNA: R21.4 U3.12 | length 20.4
  Component Side w0.254: R21.4@4.65,10.075 6.575,10.075 7.307,9.343 7.307,4.789 8.627,3.469 11.549,3.469 13.36,1.658 13.36,-2.736 12.721,-3.375 U3.12@12.5,-3.375
SNB: R27.4 U3.13 | length 24.6
  Component Side w0.254: R27.4@-3.775,6.75 -3.727,6.702 -2.538,6.702 -1.85,6.014 -1.85,5.345 -1.852,5.343 -1.852,4.907 -1.543,4.598 -0.848,4.598 -0.743,4.702 -0.307,4.702 0.002,4.393 ; 0.002,4.392 0.421,3.973 5.173,3.973 5.495,3.651 7.945,3.651 8.503,3.092 11.425,3.092 13.006,1.511 13.006,-1.161 12.411,-1.757 11.918,-1.757 11.7,-1.975 U3.13@11.7,-2.575
SNC: R33.4 U3.22 | length 35
  Component Side w0.254: R33.4@-21.925,7.075 -21.877,7.027 -20.752,7.027 -19.684,5.959 -19.684,4.006 -19.002,3.325 -14.756,3.325 -14.304,3.777 -10.94,3.777 -7.182,0.019 -4.877,0.019 -4.693,0.203 2.835,0.203 3.969,-0.931 3.969,-0.94 4.575,-1.546 6.465,-1.546 7.198,-2.279 7.198,-2.573 U3.22@7.2,-2.575
SPA: R21.3 U3.11 | length 19.7
  Component Side w0.254: R21.3@9,10.075 8.4,10.075 7.67,9.345 7.67,4.927 8.773,3.823 11.695,3.823 13.714,1.805 13.714,-2.955 12.892,-3.777 12.819,-3.777 12.721,-3.875 U3.11@12.5,-3.875
SPB: R27.3 U3.14 | length 24.5
  Component Side w0.254: v1(-1.325,5.125) -1.325,5.979 -0.602,6.702 1.377,6.702 R27.3@1.425,6.75 ; v1(-0.525,4.175) 0.123,3.527 5.118,3.527 5.348,3.297 7.798,3.297 8.357,2.738 11.279,2.738 12.652,1.365 12.652,-1.015 12.264,-1.403 11.772,-1.403 11.2,-1.974 U3.14@11.2,-2.575
  Bottom Layer w0.254: v1(-1.325,5.125) -0.572,4.372 -0.572,4.122 -0.525,4.169 v1(-0.525,4.175)
SPC: R33.3 U3.21 | length 35.4
  Component Side w0.254: R33.3@-16.725,7.075 -18.187,7.075 -19.33,5.932 -19.33,4.153 -18.856,3.679 -14.903,3.679 -14.45,4.131 -10.793,4.131 -7.035,0.373 -5.024,0.373 -4.84,0.557 2.982,0.557 4.323,-0.785 4.323,-0.793 4.707,-1.177 6.597,-1.177 7.602,-2.182 7.602,-2.256 7.7,-2.354 U3.21@7.7,-2.575
SPI1_MISO/PA6: U2.22
SPI1_MOSI/PA7: U2.23
SPI1_nCS/PA4: U2.20
SPI1_SCK/PA5: U2.21
SPI3_MISO: R22.2 U2.52 U3.29 | length 29.8
  Component Side w0.203: U2.52@-10.979,-14.503 -10.93,-14.551 -10.93,-15.157 -10.066,-16.021 -9.532,-16.021 -8.885,-16.668 -7.573,-16.668 -7.256,-16.351 v1(-7.175,-16.351) ; v1(-5.325,-15.901) -4.242,-15.901 -3.371,-15.03 -3.05,-15.03 -1.663,-13.644 -0.806,-12.786 1.002,-12.786 2.784,-11.005 2.784,-7.354 3.592,-6.546 4.235,-6.546 4.426,-6.354 4.426,-6.091 5.019,-5.499 5.039,-5.499 5.162,-5.375 U3.29@5.4,-5.375
  Component Side w0.254: U2.52@-10.979,-14.503 -10.979,-12.696 -10.751,-12.467 v1(-10.751,-12.401)
  Bottom Layer w0.203: v1(-7.175,-16.351) -6.725,-15.901 v1(-5.325,-15.901)
  Bottom Layer w0.254: R22.2@-11.355,-15 -11.355,-14.763 -10.625,-14.032 -10.625,-12.593 -10.751,-12.467 v1(-10.751,-12.401)
SPI3_MOSI: U2.53 U3.30 | length 24.1
  Component Side w0.203: U2.53@-10.479,-14.503 -10.43,-14.551 -10.43,-15.157 -9.869,-15.718 -9.407,-15.718 -8.76,-16.365 -8.344,-16.365 -7.828,-15.849 -6.577,-15.849 -6.024,-16.402 -4.315,-16.402 -3.246,-15.333 -2.924,-15.333 -1.36,-13.769 -0.681,-13.089 1.127,-13.089 3.087,-11.13 3.087,-7.48 3.717,-6.849 4.36,-6.849 4.729,-6.48 4.729,-6.288 5.019,-5.999 5.039,-5.999 5.162,-5.875 U3.30@5.4,-5.875
SPI3_nCS: U2.40 U3.32 | length 33.2
  Component Side w0.203: U2.40@-14.479,-8.503 -14.43,-8.551 -13.825,-8.551 -12.624,-9.752 -12.624,-12.358 -12.873,-12.608 -12.873,-13.083 -12.88,-13.09 -12.88,-15.207 -11.816,-16.272 -11.37,-16.272 -10.314,-17.327 -9.472,-17.327 -9.419,-17.274 -6.458,-17.274 -6.192,-17.008 -4.064,-17.008 -2.995,-15.939 -2.673,-15.939 -0.754,-14.02 -0.43,-13.695 1.378,-13.695 3.693,-11.381 3.693,-8.325 5.019,-6.999 5.039,-6.999 5.162,-6.875 U3.32@5.4,-6.875
SPI3_SCK: U2.51 U3.31 | length 25.6
  Component Side w0.203: U2.51@-11.479,-14.503 -11.43,-14.551 -11.43,-15.157 -10.263,-16.324 -9.658,-16.324 -9.011,-16.971 -6.584,-16.971 -6.317,-16.705 -4.189,-16.705 -3.12,-15.636 -2.799,-15.636 -1.057,-13.895 -0.555,-13.392 1.253,-13.392 3.39,-11.256 3.39,-7.886 v1(3.925,-7.35) ; U3.31@5.4,-6.375 5.401,-6.376 5.869,-6.376 v1(5.87,-6.378)
  Bottom Layer w0.203: v1(3.925,-7.35) 4.898,-6.378 v1(5.87,-6.378)
SPI_SW_MISO/PD2: U2.54
SPI_SW_MOSI/PB3: U2.55
SPI_SW_nCS/PB12: U2.33
SPI_SW_SCK/PB4: U2.56
SWCLK: R4.2 U2.49 | length 10.6
  Component Side w0.203: U2.49@-12.479,-14.503 -12.43,-14.551 -12.43,-15.157 -11.619,-15.969 -11.244,-15.969 -10.544,-16.669 -10.057,-16.669 -10.1,-16.712 v1(-10.1,-16.826)
  Bottom Layer w0.203: R4.2@-14.25,-13.25 -13.75,-13.25 -13.423,-13.577 -13.423,-15.488 -13.063,-15.849 -11.324,-15.849 -10.346,-16.826 v1(-10.1,-16.826)
SWDIO: R5.2 U2.46 | length 3.6
  Component Side w0.254: U2.46@-14.479,-11.503 -14.456,-11.48 -13.814,-11.48 -13.522,-11.187 -13.522,-10.797 v1(-13.475,-10.75)
  Bottom Layer w0.254: R5.2@-14.665,-9.161 -14.665,-9.387 -13.522,-10.53 -13.522,-10.703 v1(-13.475,-10.75)
TEMP_MOSFET: C37.2 R35.1 R36.1 U2.17 | length 20.3
  Component Side w0.254: v1(-8.925,-5.021) -5.825,-5.021 -4.979,-4.174 U2.17@-4.979,-3.003 ; R36.1@-7.65,7.85 -7.65,7.775 -7.016,7.141 -7.016,3.823 -6.441,3.248 -6.441,2.709 v1(-6.394,2.662)
  Bottom Layer w0.254: v1(-8.925,-5.021) -8.575,-4.67 C37.2@-8.575,-4.35 -8.65,-4.275 R35.1@-8.65,-2.7 -8.65,-2.65 -5.998,0.002 -5.998,2.199 -6.394,2.595 v1(-6.394,2.662)
TEMP_MOTOR: C17.2 R7.1 RT1.1 U2.24 | length 8.4
  Component Side w0.254: RT1.1@-10.62,-0.5 -10.34,-0.5 -8.502,-2.338 -8.502,-2.98 U2.24@-8.479,-3.003
  Bottom Layer w0.254: R7.1@-12.325,0.1 -11.725,-0.5 RT1.1@-10.62,-0.5 -10.522,-0.5 -9.771,0.252 -9.771,1.614 C17.2@-9.771,1.664
  Bottom Layer w0.4: R7.1@-12.325,0.1 R7.1@-12.1,0.325
USB_D_N: R11.1 U2.44 | length 4.4
  Component Side w0.254: v1(-16.378,-12.063) -16.331,-12.016 -16.331,-11.567 -15.29,-10.526 -14.502,-10.526 U2.44@-14.479,-10.503
  Bottom Layer w0.254: R11.1@-17.45,-13.25 -17.4,-13.25 -16.425,-12.275 v1@-16.425,-12.065
USB_D_P: R12.1 U2.45 | length 3.3
  Component Side w0.254: v1(-15.675,-12.125) -15.628,-12.078 -15.628,-11.51 -15.144,-11.026 -14.502,-11.026 U2.45@-14.479,-11.003
  Bottom Layer w0.254: R12.1@-15.9,-13.3 -15.675,-13.075 v1(-15.675,-12.125)
V_SUPPLY: C9.2 C18.2 C20.1 C21.1 C22.2 C25.1 C33.1 C34.1 C35.1 C36.1 C39.1 C40.1 C41.1 C42.1 C43.1 C44.1 C46.1 C57.1 C58.1 J3.1 Q1.5_6 Q1.5_6_1 Q1.5_6_2 Q1.5_6_3 Q1.5_6_4 Q3.5_6 Q3.5_6_1 Q3.5_6_2 Q3.5_6_3 Q3.5_6_4 Q5.5_6 Q5.5_6_1 Q5.5_6_2 Q5.5_6_3 Q5.5_6_4 R38.2 U3.6 U3.7 U3.47 | length 26.2
  Component Side w0.254: C22.2@10.925,-13.45 10.825,-13.35 v1(10.825,-12.5) 10.825,-11.352 11.2,-10.977 U3.47@11.2,-9.675 ; U3.6@12.5,-6.375 12.502,-6.373 13.083,-6.373 13.581,-5.875 ; U3.7@12.5,-5.875 13.581,-5.875 ; C9.2@17.175,-6.625 17.175,-6.775 17.075,-6.875 15.8,-6.875 C18.2@15.775,-6.85 15.775,-6.7 14.948,-5.873 13.583,-5.873 13.581,-5.875 ; C9.2@17.275,-6.875 17.598,-7.198 18.352,-7.198 18.8,-7.646 C25.1@18.8,-7.872
  Component Side w0.4: v1(10.825,-12.5) 10.844,-12.481 11.649,-12.481 11.73,-12.4 16.538,-12.4 18.504,-10.433 18.504,-8.167 C25.1@18.8,-7.872
  Bottom Layer w0.254: R38.2@8.575,-12.325 8.75,-12.5 v1(10.825,-12.5)
  other v1: 14.619,4.935 15.219,4.935 15.819,4.935 16.419,4.935 14.619,5.535 15.219,5.535 15.819,5.535 14.619,6.135 15.219,6.135 15.819,6.135 -10.581,6.735 14.619,6.735 15.219,6.735 15.819,6.735 16.419,6.735 -10.581,7.335 14.619,7.335 15.219,7.335 15.819,7.335 16.419,7.335 17.019,7.335 17.619,7.335 18.219,7.335 18.819,7.335 -10.581,7.935 14.619,7.935 15.219,7.935 15.819,7.935 16.419,7.935 17.019,7.935 17.619,7.935 18.219,7.935 18.819,7.935 -10.581,8.535 -9.981,8.535 18.819,8.535 -11.781,9.135 -11.181,9.135 -10.581,9.135 -9.981,9.135 18.819,9.135 -11.781,9.735 -11.181,9.735 -10.581,9.735 -9.981,9.735 -2.781,9.735 18.819,9.735 19.419,9.735 20.019,9.735 20.619,9.735 21.219,9.735 -10.581,10.335 -9.981,10.335 -2.781,10.335 18.819,10.335 19.419,10.335 20.019,10.335 20.619,10.335 21.219,10.335 -9.981,10.935 -2.781,10.935 18.819,10.935 19.419,10.935 20.019,10.935 20.619,10.935 21.219,10.935 -9.981,11.535 -9.381,11.535 -8.781,11.535 -8.181,11.535 -5.781,11.535 -5.181,11.535 -4.581,11.535 -3.981,11.535 -3.381,11.535 -2.781,11.535 18.819,11.535 19.419,11.535 20.019,11.535 20.619,11.535 21.219,11.535 -9.981,12.135 -9.381,12.135 -8.781,12.135 -8.181,12.135 -5.781,12.135 -5.181,12.135 -4.581,12.135 -3.981,12.135 -3.381,12.135 -2.781,12.135 -2.181,12.135 18.819,12.135 19.419,12.135 20.019,12.135 20.619,12.135 21.219,12.135 19.419,12.735 20.019,12.735 20.619,12.735 19.419,13.335 20.019,13.335
VCC: C1.2 C2.1 C4.2 C5.1 C8.2 C26.1 C47.2 C65.2 D2.1 J1.1 J8.1 L1.2 R22.1 R32.1 R36.2 RT1.2 S1.1 U1.2 U1.4 U2.1 U2.19 U2.32 U2.48 U2.64 U3.26 U11.3 U12.8 | length 164.5
  Component Side w0.254: v1(-19.825,0.577) -18.536,0.577 -16.94,2.173 -15.1,2.173 -13.827,0.9 -13.827,-2.023 v1(-12.876,-2.975) -12.876,-3.042 -12.959,-3.125 -12.959,-3.711 -11.918,-4.752 -11.421,-4.752 ; U12.8@-16.81,-4.025 -16.787,-4.002 -16.455,-4.002 v1@-16.167,-3.714 ; U2.48@-14.479,-12.503 -13.747,-12.503 v1(-13.375,-12.875) ; v1(-12.122,-12.552) -11.444,-11.874 -9.948,-11.874 -9.173,-12.648 -7.677,-12.648 v1(-7.652,-12.673) ; v1(-8.375,-6.65) -9.653,-6.65 -11.421,-4.882 -11.421,-4.752 ; R36.2@-7.65,6.7 -7.65,3.7 v1(-7,3.05) ; v1(-6.525,0.9) -6.514,0.911 3.279,0.911 3.487,0.703 4.739,0.703 v1(4.942,0.5) 4.896,0.454 4.896,-0.529 v1(4.85,-0.575) ; U2.19@-5.979,-3.003 -6.002,-3.026 -6.002,-3.667 -6.828,-4.494 -9.668,-4.494 -9.926,-4.752 -11.421,-4.752 ; U2.64@-4.979,-14.503 -4.979,-14.123 -4.956,-14.1 -4.905,-14.151 v1(-4.6,-14.151) ; v1(-4.15,-12.725) -4.083,-12.725 -3.884,-12.526 -3.002,-12.526 U2.1@-2.979,-12.503 ; J1.1@-2.15,-21.6 -1.977,-21.427 -1.257,-21.427 v1@-0.572,-20.742 ; 1.65,-11.05 2.152,-10.548 2.152,-6.123 2.42,-5.855 2.481,-5.855 2.481,-5.581 R32.1@2.25,-5.35 ; R32.1@2.45,-5.823 R32.1@2.45,-5.775 ; R32.1@2.575,-5.761 2.575,-4.278 2.424,-4.127 3.375,-3.175 v1(4.633,-3.175) 4.68,-3.222 4.68,-3.449 5.008,-3.777 5.081,-3.777 5.179,-3.875 U3.26@5.4,-3.875 ; J8.1@3.875,-20.9 3.875,-21.425 v1(3.9,-21.45) 3.906,-21.444 5.589,-21.444 6.012,-21.021 7.479,-21.021 v1(7.9,-20.6) ; S1.1@9.795,-19.475 9.81,-19.49 9.81,-20.335 v1(9.825,-20.35) ; D2.1@17.019,0.1 v1(17.8,0.1)
  Component Side w0.4: v1(-22.225,0.15) C47.2@-22.225,0.975 ; S1.1@9.795,-19.475 13.525,-19.475 18.352,-14.648 v1(18.352,-12.025)
  Bottom Layer w0.254: v1(-19.825,0.577) -19.864,0.577 -20.291,0.15 v1(-22.225,0.15) -20.389,-1.686 -17.923,-1.686 v1(-16.12,-3.488) ; v1(-13.375,-12.875) -13.129,-12.875 C1.2@-12.702,-13.303 ; R22.1@-12.655,-15 -12.702,-14.954 C1.2@-12.702,-13.303 ; C4.2@-12.627,-4.194 -12.652,-4.194 -12.975,-3.871 -12.876,-3.772 v1(-12.876,-2.975) -10.555,-2.975 RT1.2@-8.08,-0.5 ; v1(-12.122,-12.552) -12.169,-12.599 -12.169,-12.72 -12.581,-13.132 -12.702,-13.132 C1.2@-12.702,-13.303 ; C2.1@-8.575,-5.975 -8.375,-6.175 v1(-8.375,-6.65) ; v1(-7.652,-12.673) -7.652,-12.728 -7.621,-12.697 -7.561,-12.697 -7.531,-12.727 -6.973,-12.727 C5.1@-6.65,-13.05 ; -7.123,0.457 -7.123,2.927 v1(-7,3.05) ; v1(-4.6,-14.151) -4.6,-14.068 -5.583,-14.067 -6.6,-13.05 C5.1@-6.65,-13.05 ; v1@-4.252,-12.727 -4.602,-12.727 C65.2@-4.925,-13.05 -5.225,-12.75 -6.35,-12.75 C5.1@-6.65,-13.05 ; v1@-4.148,-12.623 -4.148,-10.123 -3.3,-9.275 L1.2@-3.25,-9.275 ; v1@-4.098,-12.673 -1.939,-10.514 0.763,-10.514 v1(1.45,-11.201) ; v1(-0.525,-20.525) 0.4,-21.45 v1(3.9,-21.45) ; v1(4.633,-3.175) 4.633,-0.859 4.85,-0.642 v1(4.85,-0.575) ; v1(7.9,-20.6) 9.508,-20.6 9.758,-20.35 v1(9.825,-20.35) ; U1.4@15.9,-1.675 16.148,-1.516 16.25,-1.45 17.277,-1.45 17.8,-0.927 v1(17.8,0.1)
  Bottom Layer w0.4: RT1.2@-8.08,-0.5 -7.925,-0.5 v1(-6.525,0.9) ; v1(4.942,0.5) 5.124,0.5 5.804,-0.18 5.804,-0.362 6.94,-1.498 15.198,-1.498 15.375,-1.675 15.9,-1.675 U1.2@15.9,-8.275 ; U1.2@16.25,-8.275 16.484,-8.509 16.484,-10.466 C8.2@16.719,-10.7 16.719,-10.85 17.874,-12.006 18.333,-12.006 v1(18.352,-12.025)
VOLTAGE_1: R14.1 R15.2 U2.14 | length 4.2
  Component Side w0.254: U2.14@-2.979,-6.003 -0.885,-6.003 -0.825,-6.062 v1(-0.825,-7.175)
  Bottom Layer w0.254: R15.2@-1.05,-7.75 -1.05,-7.8 R15.2@-0.752,-8.098 ; R15.2@-1.025,-7.502 -0.925,-7.502 -0.825,-7.402 v1(-0.825,-7.175)
VOLTAGE_2: R23.1 R24.2 U2.15 | length 3.9
  Component Side w0.254: U2.15@-2.979,-5.503 -2.956,-5.48 -2.107,-5.48 -1.353,-4.725 v1(-1.35,-4.725) ; v1@-1.348,-4.725 -1.348,-4.17 -1.153,-3.975 R23.1@-1.05,-3.975
  Bottom Layer w0.254: v1(-1.35,-4.725) -1.348,-4.727 -1.348,-5.327 R24.2@-1.025,-5.65
VOLTAGE_3: R28.1 R29.2 U2.16 | length 5
  Component Side w0.254: U2.16@-2.979,-5.003 -2.529,-5.003 -1.922,-4.396 v1@-1.922,-3.822 ; v1(-1.894,-3.85) v1@-1.922,-3.822 ; R28.1@-1.075,-1.9 -1.075,-1.95 -1.875,-2.75 -1.875,-3.775 v1@-1.922,-3.822
  Bottom Layer w0.254: v1(-1.894,-3.85) R29.2@-1.05,-3.85
pads on no net: H2.0 J1.M J2. J3. J5.1 J5.4 J7.M J8.M J9.M S1. U2.3 U2.4 U2.25 U2.28 U2.50 U2.58 U3.46 U3.48 U5.5 U5.6 U5.7 U5.8 U5.9 U5.10 U5.14 U11.5 U11.8 U12.7 U12.9

## Polygon pours and split planes (outlines as drawn)
GND on Bottom Layer "GND_L02_P124" (solid, remove dead copper, pour order 124): -24.925,-0.025 24.905,-0.025 cw(c-0.01,-0.195)
GND on Bottom Layer "GND_L02_P102" (solid, pour order 102): -24.957,-1.975 cw(c1.538,-0.478) -19.625,15.533 -19.625,3.8 -15.75,3.8 -14.45,5.1 -10.525,5.1 -9.225,8.7 3.138,8.7 3.138,13.75 8.05,13.75 8.05,4.475 8.225,4.3 24.713,4.3 25.015,-1.975 -15.45,-1.975 ccw(c-15.95,-0.108) -16.45,-1.975
SHC on Bottom Layer "SHC_L02_P122" (solid, pour order 122): -15.466,19.657 cw(c-0.608,1.634) -2.375,24.925 -2.375,19.657
SHA on Bottom Layer "SHA_L02_P120" (solid, pour order 120): 2.125,24.9 cw(c0.512,1.39) 15.4,19.657 2.125,19.657
SHB on Bottom Layer "SHB_L02_P118" (solid, pour order 118): -2.125,25.025 1.9,25.025 1.9,19.613 -2.125,19.612
GND on Bottom Layer "GND_L02_P114" (solid, pour order 114): -15.75,19.45 -13.75,19.45 -13.75,10.475 -19.875,10.475 -19.875,15.225 cw(c-4.324,4.168)
NetC57_2 on Bottom Layer "NETC57_2_L02_P108" (solid, pour order 108): -19.4,10.025 -13.75,10.025 -13.75,6.09 -15.84,4 -19.4,4
NetC36_2 on Bottom Layer "NETC36_2_L02_P106" (solid, pour order 106): -0.199,13.725 2.925,13.725 2.925,8.75 -0.199,8.75
NetC20_2 on Bottom Layer "NETC20_2_L02_P104" (solid, pour order 104): 8.276,13.75 12.625,13.75 12.625,4.649 8.276,4.649
V_SUPPLY on Bottom Layer "V_SUPPLY_L02_P072" (solid, pour order 72): -13.275,19.45 15.975,19.45 cw(c-0.779,-0.024) 24.5,4.55 12.9,4.55 12.9,14 -0.4,14 -0.4,8.975 -9.381,8.975 -10.725,5.35 -13.275,5.35
GND on Component Side "GND_L01_P128" (solid, remove dead copper, pour order 128): 17.6,4.436 17.6,-9.6 20.484,-9.6 20.619,-9.465 20.65,-9.497 20.65,-14.092 cw(c0.042,-0.199) -13.201,-21.23 cw(c0.233,0.103) -24.603,4.436
V_SUPPLY on Component Side "V_SUPPLY_L01_P092" (solid, pour order 92): 17.9,4.95 19.625,4.95 19.625,4.134 19.625,-9.188 17.9,-9.188 17.9,-7.5 15.175,-7.5 15.175,-6.075 17.9,-6.075 17.9,2.925
GND on Component Side "GND_L01_P100" (solid, pour order 100): -19.625,15.743 -19.625,3.3 -24.727,3.3 cw(c3.912,-1.177)
V_SUPPLY on Component Side "V_SUPPLY_L01_P070" (solid, pour order 70): 12.9,14.225 20.675,14.225 cw(c-5.344,-1.841) 24.55,4.598 12.9,4.598
GND on Component Side "GND_L01_P096" (solid, pour order 96): 3.452,11.75 7.8,11.75 7.8,4.05 3.452,4.05
NetC20_2 on Component Side "NETC20_2_L01_P088" (solid, pour order 88): 6.925,13.75 11.15,13.75 11.15,4.65 8.275,4.65 8.275,12.25 6.925,12.25
GND on Component Side "GND_L01_P098" (solid, pour order 98): -6.05,8.7 -0.667,8.7 -0.667,4.05 -6.05,4.05
NetC36_2 on Component Side "NETC36_2_L01_P086" (solid, pour order 86): -0.2,13.75 4.398,13.75 4.398,12.5 2.925,12.5 2.925,7.975 2.925,4.9 -0.2,4.9
V_SUPPLY on Component Side "V_SUPPLY_L01_P082" (solid, pour order 82): -12.325,17.225 -7.355,17.225 -7.355,8.975 -9.428,8.975 -10.737,5.325 -12.325,5.325
NetC57_2 on Component Side "NETC57_2_L01_P090" (solid, pour order 90): -19.325,10.4 -14.95,10.4 -14.95,8.875 -13.675,8.875 -13.675,6.225 -15.902,3.998 -19.325,3.998
GND on Component Side "GND_L01_P094" (solid, pour order 94): 19.925,4.3 24.682,4.3 cw(c-1.81,0.74) 19.925,-14.82
V_SUPPLY on Component Side "V_SUPPLY_L01_P084" (solid, pour order 84): -6.05,17.234 -0.675,17.234 -0.675,8.85 -6.05,8.85
SHB on Component Side "SHB_L01_P078" (solid, pour order 78): -1.95,25 -1.95,20.025 -2.325,19.65 -4.35,19.65 -4.35,17.725 -4.3,17.675 0.75,17.675 0.75,14.35 5.65,14.35 5.65,19.4 5.4,19.65 2.2,19.65 1.7,20.15 1.7,25
SHA on Component Side "SHA_L01_P080" (solid, pour order 80): 2,24.915 2,20.45 2.5,19.95 5.8,19.95 6.875,18.875 6.875,14.4 11.625,14.4 11.625,16.15 14.45,16.15 14.45,14.8 18.95,14.8 18.95,16.15 ccw(c0.685,1.601)
SHC on Component Side "SHC_L01_P074" (solid, pour order 74): -19.175,10.675 -19.175,16.279 cw(c1.349,-2.838) -2.25,24.978 -2.25,20.4 -2.7,19.95 -6.65,19.95 -6.65,18.55 -7.15,18.05 -11.1,18.05 -11.1,19.35 -12.7,19.35 -14.075,17.975 -14.075,10.675
no net on Component Side "NONET_L01_P076" (solid, pour order 76): -20.75,20.9

## Keep-outs
Keep-Out Layer:
  lines w0.254: -8.125,23.643 cw(c0,0) -6.934,24.019 ; -8.125,23.644 -8.125,33.2 7.9,33.2 7.9,23.72 ; -8.123,23.644 ccw(c0,0) 24.885,-2.398 ; -5.354,24.42 cw(c0,0) -4.004,24.677 ; -2.502,24.874 cw(c0,0) -0.925,24.983 ; 0.625,24.992 cw(c0,0) 2.209,24.902 ; 3.616,24.737 cw(c0,0) 5.057,24.483 ; 6.362,24.177 cw(c0,0) 7.9,23.719 ; 7.898,23.72 cw(c0,0) 22.395,11.111 ; 22.966,9.877 ccw(c0,0) 22.395,11.111 ; 23.493,8.55 cw(c0,0) 23.981,7.066 ; 24.31,5.835 cw(c0,0) 24.63,4.285 ; 24.853,2.703 cw(c0,0) 24.973,1.153 ; 24.887,-2.398 32.825,-2.398 32.825,11.11 22.395,11.11 ; 24.899,-2.25 ccw(c0,0) 24.993,-0.575

## Silkscreen, mask and mechanical layers (free items; w line width, h text height)
Top Overlay:
  text "V" at 0.6,23.15 h1
  text "U" at 4.775,22.45 h1
  text "W" at -6.225,22.4 h1
  text "MOTOR" at -10.3,20.275 h1
  text "V_S" at 19.625,5.7 h0.8 r90
  text "POWER" at 18.025,4.35 h1 r90
  text "Fault" at -17.675,2.375 h0.8
  text "3.3V" at 13.113,1.263 h0.8
  text "Status" at -18.35,1.125 h0.8
  text "GND" at 19.275,0.775 h0.8 r90
  text "MJ-VESC Cir. Ver0.3A / DRCL Myongji Univ. / CDI, 2019/09/16" at -7.589,-0.425 h0.9
  text "SDA/RX / SCL/TX" at 2.5,-12.525 h0.5
  text "GND" at 2.525,-13.3 h0.5
  text "VCC" at 2.525,-14.125 h0.5
  text "JTAG/SWD" at -1.975,-14.2 h0.5
  text "CAN TERM. RES SW" at 8.575,-14.425 h0.5 r270
  text "I2C2/ / USART3" at 4.65,-14.575 h0.5
  text "OFF" at 10.65,-15.025 h0.5
  text "nRST" at -4.425,-15.3 h0.5
  text "SWDIO" at -4.85,-16.075 h0.5
  text "CAN R." at 12.475,-17.75 h0.8
  text "ON" at 11.75,-20.775 h0.5
  text "GND" at -4.7,-21.15 h0.5
  text "SWCLK" at -5.7,-21.825 h0.5
  text "VCC" at -4.675,-22.55 h0.5
Bottom Overlay:
  text "V_S:5V-63V / VCC:3.3V" at 21.219,9.735 h0.8
  text "V_S" at 19.575,6.925 h0.8
  text "GND" at 19.425,0.932 h0.8
  text "CANL" at -1.1,-21.85 h0.5 r270
  text "CANL" at 5.475,-21.85 h0.5 r270
  text "CANH" at 4.35,-21.875 h0.5 r270
  text "CANH" at -2.25,-21.9 h0.5 r270